# Altium PCB Senior_DesignPCB.PcbDoc
Units mil, origin at the board's own origin, x right, y up, seen from the top; angles counter-clockwise.
Board outline 3635 x 2250 mil, 2 copper layers (Top Layer, Bottom Layer); 28 components, 28 nets, 100 pads, 5 vias.
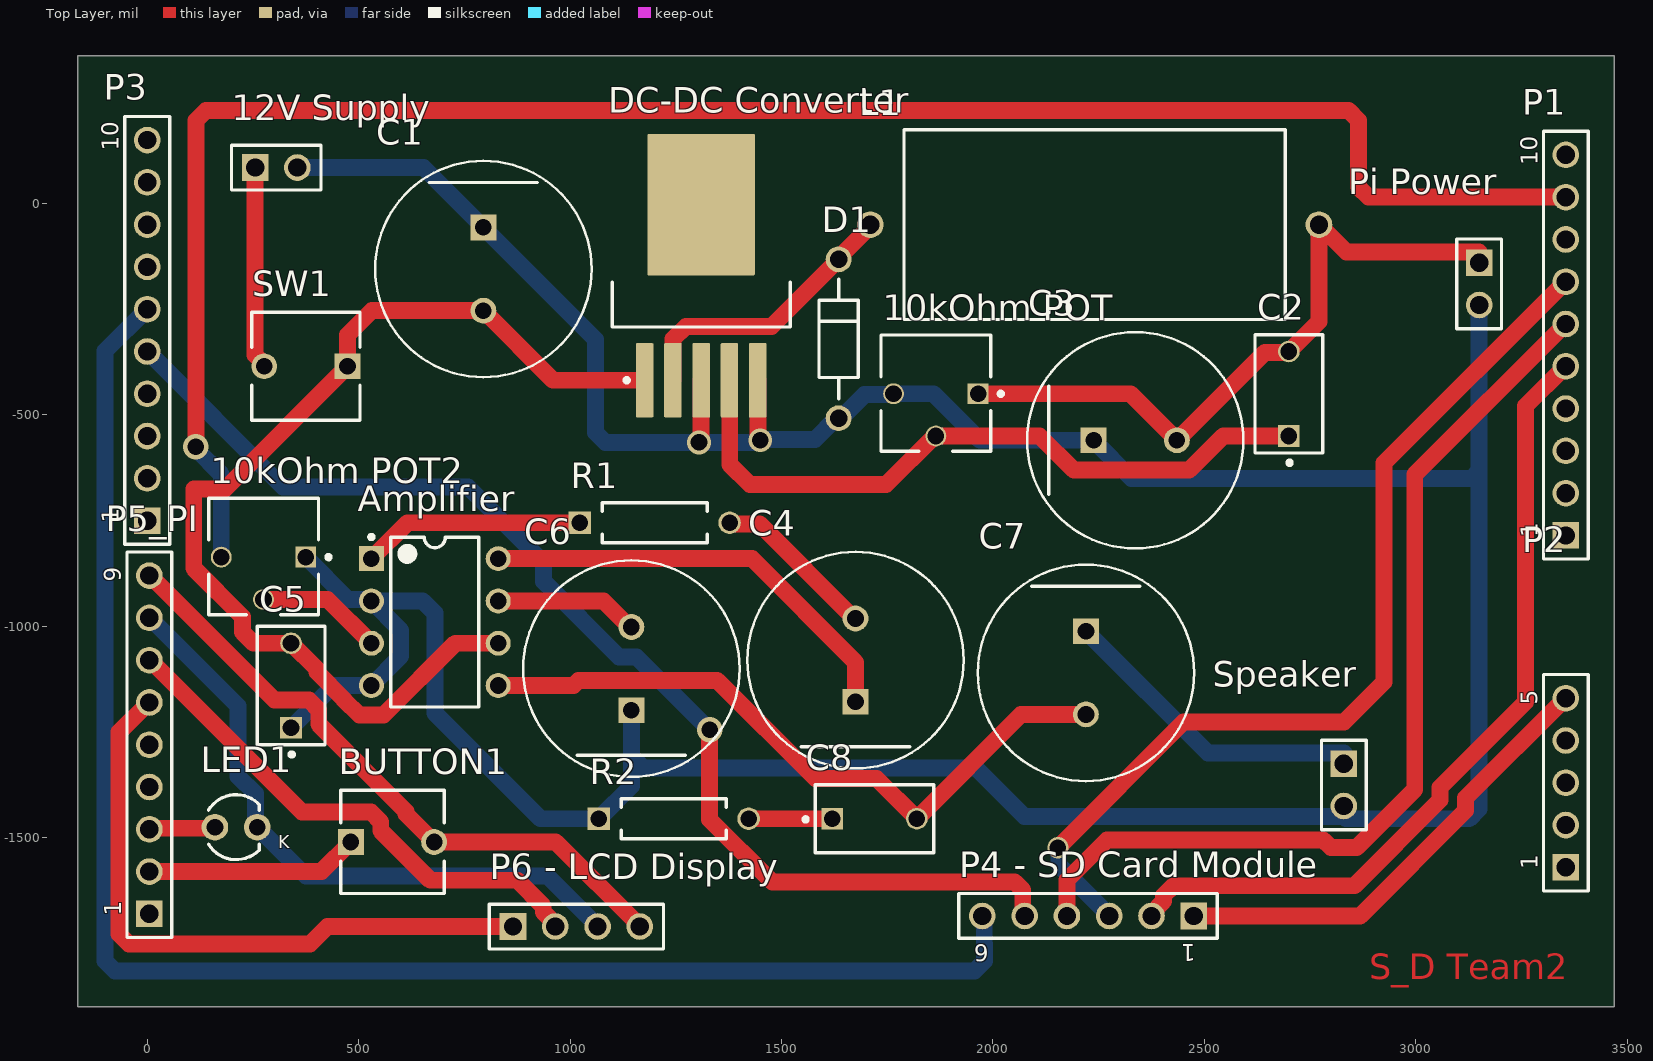
[diagram p0: Top Layer view]
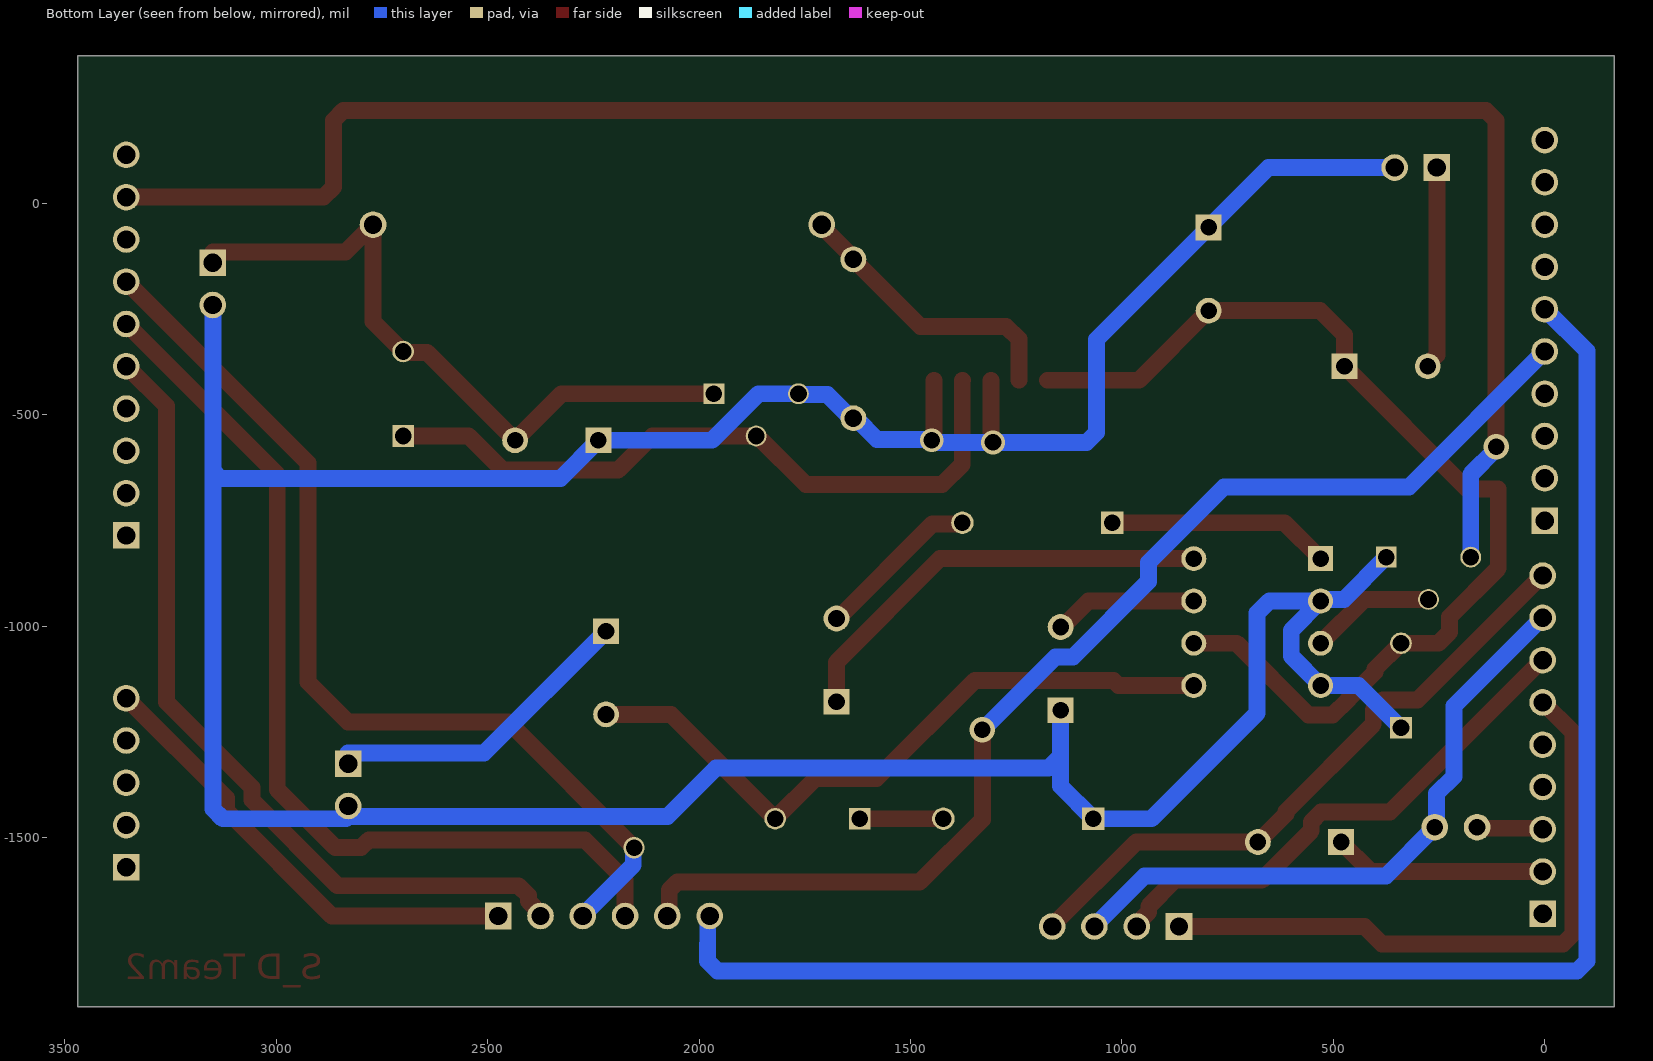
[diagram p1: Bottom Layer view, seen from below]
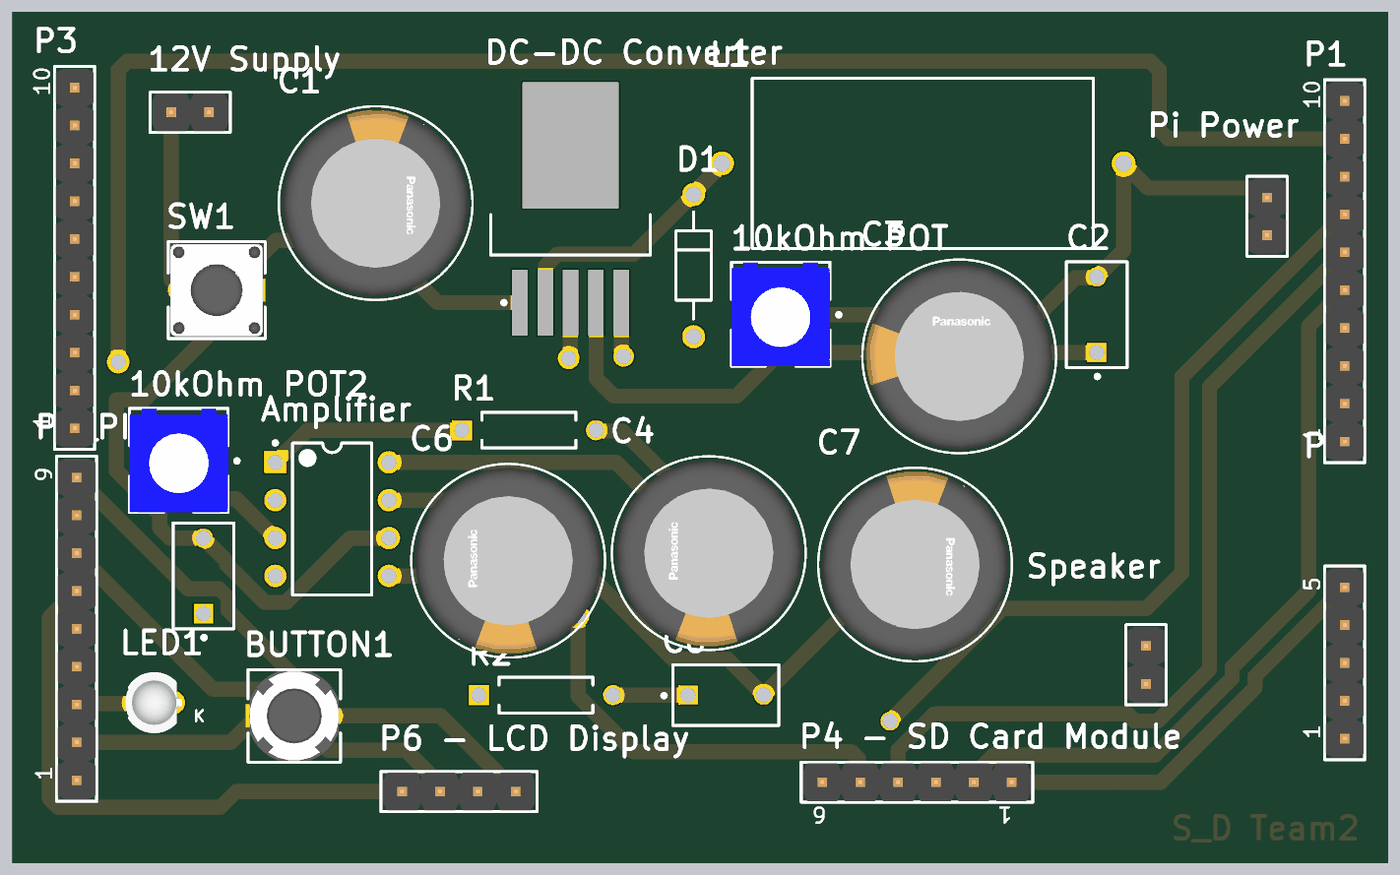
[diagram p2: 3D render of the assembled board from above, using the file's embedded part models]

## Layer stack, top to bottom
Top Solder: solder mask 0.4, Solder Resist, Dk 3.5
Top Layer: signal copper 1.4
Dielectric 1: dielectric 12.6, FR-4, Dk 4.8
Bottom Layer: signal copper 1.4
Bottom Solder: solder mask 0.4, Solder Resist, Dk 3.5

## Board outline
-165,-1900 3470,-1900 3470,350 -165,350

## Design rules (kind name [scope] priority, off if disabled: settings)
BoardOutlineClearance [All] p1: gap=12 ignorepadtopadclearanceinfootprint=FALSE
Clearance [All] p1: gap=20 ignorepadtopadclearanceinfootprint=TRUE except(24: Arc-Via Track-Via SMDPad-Via THPad-Via Via-Via Via-Fill Via-Poly Via-Region Via-Text Via-Hole)
DiffPairsRouting [All] p1: maxlimit=10 minlimit=7 mostfreqgap=10 toplayer_minwidth=6 toplayer_maxwidth=15 toplayer_prefwidth=8 bottomlayer_minwidth=6 bottomlayer_maxwidth=15 bottomlayer_prefwidth=8 maxuncoupledlength=500
HoleSize [All] p1: absolutevalues=TRUE maxlimit=1000 minlimit=39.37 maxpercent=80.000 minpercent=20.000
HoleToHoleClearance [All] p1: gap=17 allowstackedmicrovias=TRUE
PolygonConnect [All] p1: connectstyle=Relief reliefconductorwidth=10 reliefentries=4 polygonreliefangle="90 Angle" airgapwidth=10
RoutingVias [All] p1: holewidth=30 width=35 viastyle="Through Hole" minholewidth=10 minwidth=11 maxholewidth=255 maxwidth=250
SilkToSilkClearance [All] p1: silktosilkclearance=0
SolderMaskExpansion SolderMaskExpansion_1 [All] p1: expansion=4 istentingtop=FALSE
Width [All] p1: maxlimit=10000 minlimit=30 preferedwidth=50 minimp=50.000000 maximp=50.000000 favimp=50.000000
26 further rules are at their usual default settings.

## Components (designator, comment, footprint, x,y, rotation, side; value= is the part's Value field where it differs from the comment)
"10kOhm POT" "3362P-1-103LF" BOUR-3362P 1865,-448.62 r180 top
"10kOhm POT2" "3362P-1-103LF" BOUR-3362P 275,-835 r180 top
"12V Supply" "61300211121" 61300211121 305,85 r0 top
Amplifier "LM386N-1/NOPB" P0008A 680,-990 r0 top
BUTTON1 "EVQ11Y04K" FP-EVQ11Y04K-MFG 580,-1510 r0 top
C1 "680uF Cap" FP-EEUFC1J681L-MFG 795,-155 r270 top value=680uF
C2 "10nF" KEMT-C330C105M5U5TA 2700,-450 r90 top
C3 "220uF Cap" FP-EEUFC1J681L-MFG 2336.57,-560 r0 top value=680uF
C4 "10uF Cap" FP-EEUFC1J681L-MFG 1675,-1080 r90 top value=680uF
C5 "0.1uF" KEMT-C330C105M5U5TA 340,-1140 r90 top
C6 "10uF Cap" FP-EEUFC1J681L-MFG 1145,-1100 r90 top value=680uF
C7 "220uF Cap" FP-EEUFC1J681L-MFG 2220,-1110 r270 top value=680uF
C8 "0.1uF" KEMT-C330C105M5U5TA 1720,-1455 r0 top
D1 "1N4001" ONSC-AXIAL_LEAD-2-59-10_P 1635,-320 r270 top
"DC-DC Converter" "LM2596S-ADJ/NOPB" KTT0005B_M 1310,-170 r90 top
L1 "22uH" CAPA81-2290X1140_V 2240.51,-50 r0 top
LED1 "151033BS03000" "Type 3mm" 210,-1475 r0 top
P1 "Header_Ard1" 61301011121 3355,-335 r90 top
P2 "Header_Ard2" 61300511121 3355,-1370 r90 top
P3 "Header_Ard3" 61301011121 0,-300 r90 top
"P4 - SD Card Module" "61300611121" 61300611121 2225,-1685 r180 top
P5_PI "61300911121" 61300911121 5,-1280 r90 top
"P6 - LCD Display" "61300411121" 61300411121 1015,-1710 r0 top
"Pi Power" "61300211121" 61300211121 3150,-190 r270 top
R1 "MFR-25FBF52-1K" RESA60-630X240 1200,-755 r0 top value=1k
R2 "MFR-25FBF52-1K" RESA60-630X240 1245,-1455 r0 top value=10
Speaker "61300211121" 61300211121 2830,-1375 r270 top
SW1 "FSM4JRT" FP-FSM4JRT-MFG 375,-385 r180 top

## Footprints (in the part's own frame and the unit in brackets; to place one, negate y for a bottom-side part, rotate by r counter-clockwise, add the part's x,y. Pads: shape width x height; smd on the part's side, far side on the other; paste and mask are expansions set on the pad)
61300211121 [mm] "Pin Header, pitch 2.54 mm, THT, Vertical, single row, 2p"
  rect 1.6x1.6 hole 1.1: 1(-1.27,0)
  round 1.6 hole 1.1: 2(1.27,0)
  silkscreen extent -2.69,-1.35 2.69,1.35, body extent -2.54,-1.27 2.54,1.27, height 8.57
61300411121 [mm] "Pin Header, pitch 2.54 mm, THT, Vertical, single row, 4p"
  rect 1.6x1.6 hole 1.1: 1(-3.81,0)
  round 1.6 hole 1.1: 2(-1.27,0) 3(1.27,0) 4(3.81,0)
  silkscreen extent -5.23,-1.35 5.23,1.35, body extent -5.08,-1.27 5.08,1.27, height 8.57
61300511121 [mm] "Pin Header, pitch 2.54 mm, THT, Vertical, single row, 5p"
  rect 1.6x1.6 hole 1.1: 1(-5.08,0)
  round 1.6 hole 1.1: 2(-2.54,0) 3(0,0) 4(2.54,0) 5(5.08,0)
  silkscreen extent -6.5,-1.35 6.5,1.35, body extent -6.35,-1.27 6.35,1.27, height 8.57
61300611121 [mm] "Pin Header, pitch 2.54 mm, THT, Vertical, single row, 6p"
  rect 1.6x1.6 hole 1.1: 1(-6.35,0)
  round 1.6 hole 1.1: 2(-3.81,0) 3(-1.27,0) 4(1.27,0) 5(3.81,0) 6(6.35,0)
  silkscreen extent -7.77,-1.35 7.77,1.35, body extent -7.62,-1.27 7.62,1.27, height 8.57
61300911121 [mm] "Pin Header, pitch 2.54 mm, THT, Vertical, single row, 9p"
  rect 1.6x1.6 hole 1.1: 1(-10.16,0)
  round 1.6 hole 1.1: 2(-7.62,0) 3(-5.08,0) 4(-2.54,0) 5(0,0) 6(2.54,0) 7(5.08,0) 8(7.62,0) 9(10.16,0)
  silkscreen extent -11.58,-1.35 11.58,1.35, body extent -11.43,-1.27 11.43,1.27, height 8.57
61301011121 [mm] "Pin Header, pitch 2.54 mm, THT, Vertical, single row, 10p"
  rect 1.6x1.6 hole 1.1: 1(-11.43,0)
  round 1.6 hole 1.1: 2(-8.89,0) 3(-6.35,0) 4(-3.81,0) 5(-1.27,0) 6(1.27,0) 7(3.81,0) 8(6.35,0) 9(8.89,0) 10(11.43,0)
  silkscreen extent -12.85,-1.35 12.85,1.35, body extent -12.7,-1.27 12.7,1.27, height 8.57
BOUR-3362P [mm] "THD, 3-Leads, Body 6.6x6.99mm, Pitch 2.54mm"
  rect 1.25x1.25 hole 1: 1(-2.54,0.035)
  round 1.25 hole 1: 2(0,2.575) 3(2.54,0.035)
  silkscreen extent -4.03,-3.49 3.3,3.5, body extent -3.3,-3.49 3.3,3.5, height 4.5
CAPA81-2290X1140_V [mm] "Axial Lead, 2-Leads, Dia 11.4mm, Body Length 22.9mm, Pin Spacing 26.95mm"
  round 1.6 hole 1.1: 1(-13.475,0) 2(13.475,0)
  silkscreen extent -11.45,-5.7 11.45,5.7, body extent -11.45,-5.7 11.45,5.7, height 11.4
FP-EEUFC1J681L-MFG [mm]
  rect 1.55x1.55 hole 1 paste-1000 mask+0: 1(-2.5,0)
  round 1.55 hole 1 paste-1000 mask+0: 2(2.5,0)
  silkscreen extent -6.5,-6.5 6.5,6.5, body extent -6.6,-6.6 6.6,6.6, height 0.25
FP-EVQ11Y04K-MFG [mm]
  rect 1.55x1.55 hole 1 paste-1000 mask+0: A(-2.5,0)
  round 1.55 hole 1 paste-1000 mask+0: B(2.5,0)
  silkscreen extent -3.1,-3.1 3.1,3.1, body extent -3.37,-3.2 3.37,3.2, height 0.25
FP-FSM4JRT-MFG [mil]
  rect 60.65x60.65 hole 39.37 paste-39370.1 mask+0: 1(-98.5,0)
  round 60.65 hole 39.37 paste-39370.1 mask+0: 2(98.5,0)
  silkscreen extent -128,-128 128,128, body extent -133,-132 133,132, height 10
KEMT-C330C105M5U5TA [mm] "THD, 2-Leads, Body 7.11x4.07mm"
  rect 1.3x1.3 hole 1: 1(-2.54,0)
  round 1.3 hole 1: 2(2.54,0)
  silkscreen extent -4.27,-2.03 3.55,2.03, body extent -3.55,-2.03 3.55,2.03, height 9.14
KTT0005B_M [mm] "DPAK, 5-Leads, Body 10.65x9.65mm, Pitch 1.7mm, IPC Low Density"
  rrect10% 4.45x1.05 smd: 1(-6.3,3.4) 2(-6.3,1.7) 3(-6.3,0) 4(-6.3,-1.7) 5(-6.3,-3.4)
  rrect2% 8.5x6.45 smd: 6(4.25,0)
  silkscreen extent -6.42,-5.35 -0.4,5.35, body extent -3.1,-5.32 6.55,5.33, height 4.83
ONSC-AXIAL_LEAD-2-59-10_P [mm] "AXIAL, 2-Leads, Diameter 2.35mm"
  round 1.55 hole 1.05: 1(-4.77,0) 2(4.77,0)
  silkscreen extent -3.59,-1.17 3.59,1.17
P0008A [mm] "DIP, 8-Leads, Body 10.15x6.6mm, Pitch 2.54mm"
  rect 1.5x1.5 hole 1: 1(-3.81,3.81)
  round 1.5 hole 1: 2(-3.81,1.27) 3(-3.81,-1.27) 4(-3.81,-3.81) 5(3.81,-3.81) 6(3.81,-1.27) 7(3.81,1.27) 8(3.81,3.81)
  silkscreen extent -3.93,-5.1 2.65,5.23, body extent -3.95,-5.07 3.95,5.07, height 5.08
RESA60-630X240 [mm] "Axial Resistor, 2-Leads, Dia 2.4mm, Body Length 6.3mm"
  rect 1.35x1.35 hole 1: 1(-4.5,0)
  round 1.35 hole 1: 2(4.5,0)
  silkscreen extent -3.15,-1.2 3.15,1.2, body extent -4.77,-1.19 4.77,1.2, height 2.4
"Type 3mm" [mm] "THT, LED-3mm, 2pin- Body 4.15mm(max)"
  round 1.6 hole 1: 1(1.27,0) 2(-1.27,0)
  silkscreen extent -1.66,-1.95 1.4,1.95, body extent -1.93,-1.94 1.87,1.94, height 10.5

## Part data
"10kOhm POT" "10kOhm POT2": library part CMP-009-00039-1, "Square Trimpot(R) Trimming Potentiometer, 10 KOhm, 300 V, -55 to 125 degC, 3-Pin THD, RoHS, Tube", Case/Package=3326P, Manufacturer=Bourns, Max Operating Temperature=125°C, Min Operating Temperature=-55°C, Package Description="3-Pin Through Hole Device, Body 6.6 x 6.99 mm, Pitch 2.54 mm", Package Quantity=250, Power=500mW, Resistance=10k, Tolerance=10%, Voltage Rating=300V, Composition=Potentiometer, Datasheet URL=http://www.bourns.com/docs/Product-Datasheets/3362.pdf, Datasheet Version=May-16, Lead Pitch=2.54mm, Manufacturer URL=http://www.bourns.com/, Mounting Technology=TH, Package Reference=3326P, Packaging=Rail/Tube, Pins=3, RoHS Compliant=True
"12V Supply" "Pi Power" Speaker: library part CMP-1712-00002-4, "THT Vertical Pin Header WR-PHD, Pitch 2.54 mm, Single Row, 2 pins", Contact Resistance=20mOhm, Manufacturer="Wurth Elektronik", Operating Temperature=-40to105degC, Rated Current=3A, Withstanding Voltage=500VAC, Working Voltage=250VAC, Datasheet URL=https://katalog.we-online.de/em/datasheet/6130xx11121.pdf, Gender=Male, Manufacturer URL=http://www.we-online.de, Mounting Technology=THT, Orientation=Vertical, Package Reference=61300211121, Packaging=Bag, Part Number=61300211121, Pin Number=2, Pitch=2.54mm, Publisher=WurthElektronik, Row Number=Single
Amplifier: library part CMP-0057-00052-4, "Low Voltage Audio Power Amplifier, 8-pin MDIP, Pb-Free", Manufacturer="Texas Instruments", PackageTopMarking=NSUZXYTTE#*LM*386N-1, PowerWise=N, Code_JEDEC=MS-001-BA, ComponentLink1Description="Datasheet URL", ComponentLink1URL=http://www.ti.com/general/docs/lit/getliterature.tsp?genericPartNumber=LM386&fileType=pdf, CompType="Audio IC", PackageDescription="MDIP, .365 x .250 x .130in, 8 Lead, .100in Pitch", PackageReference=P0008A, PinCount=8, RoHS=Y
BUTTON1: library part CMP-05618-000106-1, "SWITCH TACTILE SPST-NO 0.02A 15V", Actuator Color=Black, Case/Package=Radial, Contact Resistance=50mR, Max Operating Temperature=70°C, Max Voltage Rating (DC)=15V, Min Operating Temperature=-20°C, Operating Force=1.6N, Package Quantity=1, Actuator Length=0.4mm, Actuator Type=Standard, Electrical Life=1000000Cycles, Illumination Type=Non-Illuminated, Lead Free="Lead Free", Mechanical Life=1000000Cycles, Mount="Through Hole", Orientation=Straight, Packaging="Tape and Reel", Radiation Hardening=No, RoHS Compliant=Yes, Series=EVQ11, Size=6mm, Switch Function=Off-Mom, Switch Travel=0.25mm, Termination="PC Pin", Throw Configuration=SPST
C1 C3 C4 C6 C7: library part CMP-05427-000007-1, "CAP ALUM 680UF 20% 63V RADIAL", Capacitance=680uF, Leakage Current=428.4uA, Manufacturer=Panasonic, Manufacturer Part Number=EEUFC1J681L, Package=0, Ripple Current=2265mA, Temperature="-55°C to +105°C", Temperature Range High=+105°C, Temperature Range Low=-55°C, Tolerance=20%, Voltage Rating=63V, Automotive=Yes, Automotive Grade="Grade 2", Category=Cap, ComponentLink2Description=Datasheet, ComponentLink2URL=https://industrial.panasonic.com/cdbs/www-data/pdf/RDF0000/ABA0000C1209.pdf, Device Class L1="Passive Components", Device Class L2=Capacitors, Device Class L3="Aluminum Electrolytic Capacitors", Digikey Description="CAP ALUM 680UF 20% 63V RADIAL", Dissipation Factor=8%, Height=37mm, Ipc Land Pattern Name=CAPRD500W100D1300H3700, Lead Free=Yes, Life=5000Hours, Material=Aluminum, Mouser Description="Aluminum Electrolytic Capacitors - Leaded 680uF 63V", Octopart=https://octopart.com/eeu-fc1j681l-panasonic-39478579, RoHS=TRUE
C2 C5 C8: library part CMP-2000-06056-1, "Ceramic Capacitor, 1 uF, +/- 20%, 50 V, -10 to 85 degC, 2-Pin THD, RoHS, Bulk", Capacitance=1µF, Manufacturer=Kemet, Operating Temperature=10°C~85°C, Package / Case=Radial, Package Description="2-Pin Through Hole Device, Body 7.11 x 4.07 mm", Package Reference=C330C105M5U5TA, Ratings=-, Standard Package=250, Temperature Coefficient=Z5U, Tolerance=±20%, Voltage - Rated=50V, Applications=GeneralPurpose, Catalog Drawings=C330(std), Category=Capacitors, Datasheet URL=http://www.kemet.com/Lists/ProductCatalog/Attachments/599/KEM_C1051_GOLDMAX_Z5U.pdf, Datasheet Version=12/2015, Family=CeramicCapacitors, Features=-, Height - Seated (Max)="0.360\"(9.14mm)", Lead Spacing="0.200\"(5.08mm)", Lead Style=Straight, Manufacturer URL=http://www.kemet.com/, Mounting Technology=ThroughHole, Mounting Type=ThroughHole, Online Catalog=GoldenMax™Series, Other Names=399-4390, Packaging=Bulk, PCN Design/Specification=C3yySeriesGoldenMaxLeadConfiguration02/Feb/2015, Product Training Modules=CapacitorBasics-TypicalUsesforCapacitors, Series=GoldenMax™, Size / Dimension="0.300\"Lx0.150\"W(7.62mmx3.81mm)", Thickness (Max)=-
D1: library part CMP-0902-00117-1, "Standard Recovery Rectifier, 2-Pin Axial_Lead, Pb-Free, Bulk Bag", Manufacturer="On Semiconductor", ComponentLink1Description="Manufacturer URL", ComponentLink1URL=http://www.onsemi.com/, ComponentLink2Description=Datasheet, ComponentLink2URL=http://www.onsemi.com/pub_link/Collateral/1N4001-D.PDF, ComponentLink3Description="Package Specification", ComponentLink3URL=http://www.onsemi.cn/pub_link/Collateral/59-10.PDF, DatasheetVersion="Rev. 13", IFSM Max (A)=30, IO(rec) Max (A)=1, Mounting Technology="Through Hole", PackageDescription="2-Pin, Axial Lead, Diameter 2.35 mm", PackageReference=AXIAL_LEAD-2-59-10, PackageVersion="Rev. U, 02/2005", Packing="Bulk Bag", PartNumber=1N4001, RoHS=TRUE, Type="Standard Recovery", VRRM Max (V)=50
"DC-DC Converter": library part CMP-0069-00271-3, "SIMPLE SWITCHER® Power Converter 150 KHz 3A Step-Down Voltage Regulator, 5-pin TO-263, Pb-Free", Manufacturer="Texas Instruments", PackageTopMarking="NSUZXYTTE#*LM2596S*-ADJ P+", PowerWise=N, Code_JEDEC=MO-169-AB, ComponentLink1Description="Datasheet URL", ComponentLink1URL=http://www.ti.com/general/docs/lit/getliterature.tsp?genericPartNumber=LM2596&fileType=pdf, CompType=Switcher, PackageDescription="TO-263, Molded, .400 x .390 x .180in, 5 Lead, .067in Pitch, Surface Mount", PackageReference=KTT0005B, PinCount=5, RoHS=Y
L1: library part CMP-2000-05083-1, "Axial Power Inductor, 22 uH, +/- 10%, -55 to 125 degC, 2-Pin THD, RoHS, Bulk", Current - Saturation=-, Current Rating=6.07A, DC Resistance (DCR)=26mOhmMax, Frequency - Test=1kHz, Inductance=22µH, Manufacturer=Abracon, Operating Temperature=-55degC~125degC, Package / Case=Axial, Package Description="2-Pin Axial Lead, Dia 11.4 mm, Body Length 22.9 mm", Package Reference=CAPA81-2290X1140, Tolerance=±10%, Category=Inductors,Coils,Chokes, Datasheet URL=http://datasheet.octopart.com/AIAP-03-220K-Abracon-datasheet-38892904.pdf, Datasheet Version=Jan-12, Family=FixedInductors, Frequency - Self Resonant=-, Height - Seated (Max)=-, Manufacturer URL=http://www.abracon.com/, Material - Core=-, Mounting Type=ThroughHole, Packaging=Bulk, Q @ Freq=-, Ratings=-, Series=AIAP-03, Shielding=Unshielded, Size / Dimension="0.450\"Diax0.900\"L(11.40mmx22.90mm)", Type=Wirewound
LED1: library part CMP-1489-00002-1, "THT LED round mono-color waterclear, WL-TMRW , Blue", Emitting color=Blue, Manufacturer="Wuerth Elektronik", ComponentLink1Description="Manufacturer URL", ComponentLink1URL=http://www.we-online.com, ComponentLink2Description=Datasheet, ComponentLink2URL=http://katalog.we-online.de/pbs/datasheet/7448042001.pdfhttp://katalog.we-online.de/pbs/datasheet/7448042001.pdfhttp://katalog.we-online.de/pbs/datasheet/7448042001.pdfhttp://katalog.we-online.de/pbs/datasheet/151033BS03000.pdf, PackageReference="Type 3mm", PartNumber=151033BS03000
P1 P3: library part CMP-1502-01082-1, "THT Vertical Pin Header WR-PHD, Pitch 2.54 mm, Single Row, 10 pins", Contact Resistance=20mOhm, Manufacturer="Wurth Elektronik", Operating Temperature=-40to105degC, Package Reference=61301011121, Rated Current=3A, Withstanding Voltage=500VAC, Working Voltage=250VAC, Datasheet URL=https://katalog.we-online.de/em/datasheet/6130xx11121.pdf, Gender=Male, Manufacturer URL=http://www.we-online.de, Mounting Technology=THT, Orientation=Vertical, Packaging=Bag, Part Number=61301011121, Pin Number=10, Pitch=2.54mm, Publisher=WurthElektronik, Row Number=Single
P2: library part CMP-1502-01068-1, "THT Vertical Pin Header WR-PHD, Pitch 2.54 mm, Single Row, 5 pins", Contact Resistance=20mOhm, Manufacturer="Wurth Elektronik", Operating Temperature=-40to105degC, Package Reference=61300511121, Rated Current=3A, Withstanding Voltage=500VAC, Working Voltage=250VAC, Datasheet URL=https://katalog.we-online.de/em/datasheet/6130xx11121.pdf, Gender=Male, Manufacturer URL=http://www.we-online.de, Mounting Technology=THT, Orientation=Vertical, Packaging=Bag, Part Number=61300511121, Pin Number=5, Pitch=2.54mm, Publisher=WurthElektronik, Row Number=Single
"P4 - SD Card Module": library part CMP-1502-01070-1, "THT Vertical Pin Header WR-PHD, Pitch 2.54 mm, Single Row, 6 pins", Contact Resistance=20mOhm, Manufacturer="Wurth Elektronik", Operating Temperature=-40to105degC, Rated Current=3A, Withstanding Voltage=500VAC, Working Voltage=250VAC, Datasheet URL=https://katalog.we-online.de/em/datasheet/6130xx11121.pdf, Gender=Male, Manufacturer URL=http://www.we-online.de, Mounting Technology=THT, Orientation=Vertical, Package Reference=61300611121, Packaging=Bag, Part Number=61300611121, Pin Number=6, Pitch=2.54mm, Publisher=WurthElektronik, Row Number=Single
P5_PI: library part CMP-1502-01080-1, "THT Vertical Pin Header WR-PHD, Pitch 2.54 mm, Single Row, 9 pins", Contact Resistance=20mOhm, Manufacturer="Wurth Elektronik", Operating Temperature=-40to105degC, Rated Current=3A, Withstanding Voltage=500VAC, Working Voltage=250VAC, Datasheet URL=https://katalog.we-online.de/em/datasheet/6130xx11121.pdf, Gender=Male, Manufacturer URL=http://www.we-online.de, Mounting Technology=THT, Orientation=Vertical, Package Reference=61300911121, Packaging=Bag, Part Number=61300911121, Pin Number=9, Pitch=2.54mm, Publisher=WurthElektronik, Row Number=Single
"P6 - LCD Display": library part CMP-1502-01064-1, "THT Vertical Pin Header WR-PHD, Pitch 2.54 mm, Single Row, 4 pins", Contact Resistance=20mOhm, Manufacturer="Wurth Elektronik", Operating Temperature=-40to105degC, Rated Current=3A, Withstanding Voltage=500VAC, Working Voltage=250VAC, Datasheet URL=https://katalog.we-online.de/em/datasheet/6130xx11121.pdf, Gender=Male, Manufacturer URL=http://www.we-online.de, Mounting Technology=THT, Orientation=Vertical, Package Reference=61300411121, Packaging=Bag, Part Number=61300411121, Pin Number=4, Pitch=2.54mm, Publisher=WurthElektronik, Row Number=Single
R1 R2: library part CMP-009-00048-3, "Axial Resistor, 1 KOhm, +/- 1%, 250 mW, -55 to 155 degC, 2-Pin THD, RoHS, Bulk", Case/Package=Axial, Manufacturer=Yageo, Max Operating Temperature=155°C, Min Operating Temperature=-55°C, Package Description="2-Pin Axial Lead, Dia 2.4 mm, Body Length 6.3 mm", Package Quantity=200, Package Reference=MFR-25, Power=250mW, Tolerance=1%, Voltage Rating=250V, Composition=CarbonFilm, Datasheet URL=http://www.yageo.com/documents/recent/Yageo%20LR_MFR_2013.pdf, Datasheet Version=Apr-13, Manufacturer URL=http://www.yageo.com/, Mounting Technology=TH, Packaging=Bulk, RoHS Compliant=True
SW1: library part CMP-03407-000038-1, "SWITCH TACTILE SPST-NO 0.05A 24V", Case/Package=Radial, Contact Current Rating=50mA, Contact Resistance=100mR, Max Operating Temperature=105°C, Max Voltage Rating (DC)=12V, Min Operating Temperature=-35°C, Operating Force=1.57N, Package Quantity=10000, Actuator Diameter=3.5mm, Actuator Length=0.055inch, Actuator Material=Resin, Actuator Type=Standard, Contact Material="Copper Alloy", Contact Plating=Silver, Current Rating=50mA, Depth=6.19mm, Electrical Life=100000Cycles, Illumination Type=Non-Illuminated, Length=6.19mm, Max Current Rating=50mA, Mechanical Life=100000Cycles, Mount="Through Hole", Orientation=Straight, Packaging="Tape and Reel", Radiation Hardening=No, RoHS Compliant=Yes, Series=FSMJRT, Switch Function=Off-Mom, Switch Travel=0.25mm, Termination="PC Pins", Throw Configuration=SPST, Type=Switch, Voltage Rating (DC)=12V

## Via types
v1: diameter 60, hole 39.37, Top Layer to Bottom Layer, 2 vias
v2: diameter 57, hole 39.37, Top Layer to Bottom Layer, 1 vias
v3: diameter 50, hole 39.37, Top Layer to Bottom Layer, 1 vias
v4: diameter 55, hole 39.37, Top Layer to Bottom Layer, 1 vias

## Nets (pads, with @x,y where several pads share a name; then routed paths per layer and width w, separated by ;. In a path a pad name is that pad's centre, name@x,y a point inside that pad or via, vN(x,y) a via of type N, cw(c..) or ccw(c..) an arc to the next point about the centre after c; other vN are vias at no path point)
5V/PI: "P6 - LCD Display.4" BUTTON1.B P5_PI.9 | length 1527.5
  Top Layer w40: P5_PI.9 6.11,-880 300.52,-1174.41 382.16,-1174.41 405.59,-1197.84 405.59,-1231.57 612.09,-1438.07 612.09,-1443.66 BUTTON1.B 966.11,-1510 1165,-1708.89 1165,-1710
BUTTON/GPIO: BUTTON1.A P5_PI.2 | length 505.6
  Top Layer w40: P5_PI.2 411.57,-1580 BUTTON1.A
CS: "P4 - SD Card Module.1" P2.5 | length 1110.7
  Top Layer w40: 2475,-1685 2868.6,-1685 3117.62,-1435.98 3117.62,-1406.27 3353.89,-1170 P2.5
GND: "10kOhm POT2.1" "10kOhm POT.3" "12V Supply.2" "DC-DC Converter.3" "DC-DC Converter.5" "Pi Power.2" Amplifier.2 Amplifier.4 C1.1 C3.1 C5.1 C6.1 D1.2 R2.1 Speaker.2 | length 8732.7
  Top Layer w40: v2(1305,-565) 1305,-562.29 1309.33,-557.96 1309.33,-418.7 1310,-418.03 ; 1443.86,-418.03 1444.53,-418.7 1444.53,-551.82 1450,-557.29 v4(1450,-560)
  Bottom Layer w40: C5.1 440,-1140 Amplifier.4 599.53,-1070.47 599.53,-1009.53 Amplifier.2 ; 355,85 653.43,85 C1.1 1060,-321.57 1060,-541.57 1083.43,-565 v2(1305,-565) 1442.29,-565 1447.29,-560 v4(1450,-560) 1451.91,-558.09 1579.02,-558.09 1629.31,-507.8 D1.2 1640.69,-507.8 1696.72,-451.76 1763.24,-451.76 1765,-450 1859.22,-450 1969.22,-560 C3.1 2328.15,-650 3131.57,-650 3150,-631.57 ; 375,-836.38 474.98,-936.35 526.35,-936.35 Amplifier.2 ; C6.1 1145,-1306.57 ; 3150,-265 3150,-631.57 ; Amplifier.2 651.57,-940 680,-968.43 680,-1205 930,-1455 R2.1 1145,-1377.83 1145,-1306.57 ; 1145,-1306.57 1173.43,-1335 1960,-1335 2075,-1450 2830,-1450 2835,-1455 3126.57,-1455 3150,-1431.57 3150,-631.57
GND/PI: "P6 - LCD Display.3" LED1.1 P5_PI.8 | length 1504.3
  Bottom Layer w40: P5_PI.8 6.11,-980 215,-1188.89 215,-1355 255.6,-1395.6 255.6,-1470.6 LED1.1 375.67,-1590.67 946.78,-1590.67 1065,-1708.89 1065,-1710
GND/SD: "P4 - SD Card Module.6" P3.6 | length 3791.7
  Bottom Layer w40: P3.6 -1.11,-250 -100,-348.89 -100,-1791.57 -76.57,-1815 1956.57,-1815 1980,-1791.57 1980,-1751.57 1979.4,-1750.97 1979.4,-1689.4 1975,-1685
GND_Amp: P1.4
LED/GPIO: LED1.2 P5_PI.3 | length 157.1
  Top Layer w40: P5_PI.3 7.5,-1477.5 157.5,-1477.5 LED1.2
MISO: "P4 - SD Card Module.4" P1.6 | length 2261.4
  Top Layer w40: 2175,-1685 2175,-1600 2270,-1505 2781.11,-1505 2799.57,-1523.46 2860.43,-1523.46 2997.62,-1386.27 2997.62,-641.27 3353.89,-285 P1.6
MOSI: "P4 - SD Card Module.3" P1.7 | length 2270.6
  Top Layer w40: v3(2153.71,-1523.71) 2450.88,-1226.54 2830.03,-1226.54 2925,-1131.57 2925,-613.89 3353.89,-185 P1.7
  Bottom Layer w40: v3(2153.71,-1523.71) 2155.62,-1525.62 2155.62,-1564.51 2275,-1683.89 2275,-1685
"Net10kOhm POT2_2": "10kOhm POT2.2" Amplifier.3 | length 297.9
  Top Layer w40: 275,-936.38 426.38,-936.38 Amplifier.3
"Net10kOhm POT_1": "10kOhm POT.1" "Pi Power.1" C2.2 C3.2 L1.2 | length 1602.9
  Top Layer w40: 1965,-450 2325,-450 C3.2 2642.86,-352.14 2697.86,-352.14 C2.2 2771.02,-278.98 L1.2 2836.02,-115 3150,-115
"Net10kOhm POT_2": "10kOhm POT.2" "DC-DC Converter.4" C2.1 | length 1656.2
  Top Layer w40: 1376.93,-418.03 1377.6,-418.7 1377.6,-617.6 1425,-665 1747.51,-665 1862.51,-550 2110.56,-550 2191.07,-630.51 2464.21,-630.51 2544.72,-550 C2.1
"Net12V Supply_1": "12V Supply.1" SW1.2 | length 478.9
  Top Layer w40: 255,85 255,-357.91 276.5,-379.41 SW1.2
NetAmplifier_1: Amplifier.1 R1.1 | length 528
  Top Layer w40: Amplifier.1 615,-755 R1.1
NetAmplifier_5: Amplifier.5 C7.2 C8.2 | length 1632.6
  Top Layer w40: Amplifier.5 1007.58,-1140 1019.66,-1127.91 1347.91,-1127.91 1580,-1360 1725,-1360 C8.2 2066.57,-1208.43 C7.2
NetAmplifier_7: Amplifier.7 C6.2 | length 340.5
  Top Layer w40: Amplifier.7 1078.57,-940 1140.15,-1001.57 C6.2
NetAmplifier_8: Amplifier.8 C4.1 | length 1039.9
  Top Layer w40: Amplifier.8 1430,-840 1675,-1085 C4.1
NetC4_2: C4.2 R1.2 | length 391.7
  Top Layer w40: R1.2 1379.68,-757.52 1447.52,-757.52 1671.57,-981.57 C4.2
NetC7_1: C7.1 Speaker.1 | length 729.5
  Bottom Layer w40: C7.1 2508.43,-1300 Speaker.1@2830,-1300
NetC8_1: C8.1 R2.2 | length 197.8
  Top Layer w40: R2.2 C8.1
NetD1_1: "DC-DC Converter.2" D1.1 L1.1 | length 680.2
  Top Layer w40: 1243.07,-418.03 1243.74,-417.36 1243.74,-320.67 1273.97,-290.43 1346.03,-290.43 1476.77,-290.43 D1.1 1635,-128.6 1710,-53.6 L1.1
SCK: "P4 - SD Card Module.2" P1.5 | length 1957.5
  Top Layer w40: 2375,-1685 2375,-1678.78 2403.5,-1650.27 2403.5,-1636.94 2426.94,-1613.5 2855.24,-1613.5 3057.62,-1411.13 3057.62,-1381.41 3260,-1179.04 3260,-478.89 3353.89,-385 P1.5
SCL/LCD: "P6 - LCD Display.2" P5_PI.7 | length 1244.4
  Top Layer w40: P5_PI.7 6.11,-1080 365.6,-1439.49 528.66,-1439.49 552.09,-1462.92 552.09,-1483.38 669.28,-1600.57 875.13,-1600.57 936.5,-1661.94 936.5,-1675.27 965,-1703.78 965,-1710
SDA/LCD: "P6 - LCD Display.1" P5_PI.6 | length 1536.7
  Top Layer w40: P5_PI.6 3.89,-1180 -66.5,-1250.39 -66.5,-1728.06 -43.06,-1751.5 384.47,-1751.5 425.97,-1710 865,-1710
VCC: "DC-DC Converter.1" Amplifier.6 C1.2 C5.2 SW1.1 | length 2500.1
  Top Layer w40: Amplifier.6 728.33,-1040 558.33,-1210 501.67,-1210 465.59,-1173.92 465.59,-1172.99 401.07,-1108.47 401.07,-1101.07 C5.2 250.96,-1040 225,-1014.04 225,-977.75 110,-862.75 110,-675.04 183.46,-675.04 SW1.1 473.5,-311.46 531.54,-253.43 C1.2 959.61,-418.03 1176.14,-418.03
VCC/SD: "P4 - SD Card Module.5" P3.5 | length 2811.4
  Top Layer w40: v1(1330,-1245) 1330,-1456.99 1478.01,-1605 2051.57,-1605 2070.6,-1624.03 2070.6,-1680.6 2075,-1685
  Bottom Layer w40: P3.5 1.11,-350 321.39,-670.28 758.61,-670.28 937.2,-848.87 937.2,-893.49 1115.79,-1072.09 1157.09,-1072.09 v1(1330,-1245)
Vin_Amp: "10kOhm POT2.3" P1.9 | length 4485.1
  Top Layer w40: v1(115,-575) 115,196.57 138.43,220 2841.57,220 2865,196.57 2865,38.43 2888.43,15 P1.9
  Bottom Layer w40: v1(115,-575) 115,-580.41 175,-640.41 175,-836.38
pads on no net: "DC-DC Converter.6" P1.1 P1.2 P1.3 P1.8 P1.10 P2.1 P2.2 P2.3 P2.4 P3.1 P3.2 P3.3 P3.4 P3.7 P3.8 P3.9 P3.10 P5_PI.1 P5_PI.4 P5_PI.5

## Other copper
Top Layer:
  text "S_D Team2" at 2890,-1835 h60

## Text inside footprints (layer, text, board x,y; h text height)
LED1: Top Overlay "K" at 310,-1525 h30; Mechanical 15 "K" at 310,-1525 h30
P1: Top Overlay "10" at 3288.07,90.2 h40 r90; Top Overlay "1" at 3288.07,-789.72 h40 r90
P2: Top Overlay "5" at 3288.07,-1184.96 h40 r90; Top Overlay "1" at 3288.07,-1574.72 h40 r90
P3: Top Overlay "10" at -66.93,125.2 h40 r90; Top Overlay "1" at -66.93,-754.72 h40 r90
"P4 - SD Card Module": Top Overlay "1" at 2479.72,-1751.93 h40 r180; Top Overlay "6" at 1989.96,-1751.93 h40 r180
P5_PI: Top Overlay "1" at -61.93,-1684.72 h40 r90; Top Overlay "9" at -61.93,-894.96 h40 r90